# Altium PCB An toan tia lua 1.PcbDoc
Units mil, origin at the board's own origin, x right, y up, seen from the top; angles counter-clockwise.
Board outline 1015.03 x 2315.03 mil, 2 copper layers (Top Layer, Bottom Layer); 3 components, 12 nets, 35 pads, 0 vias.
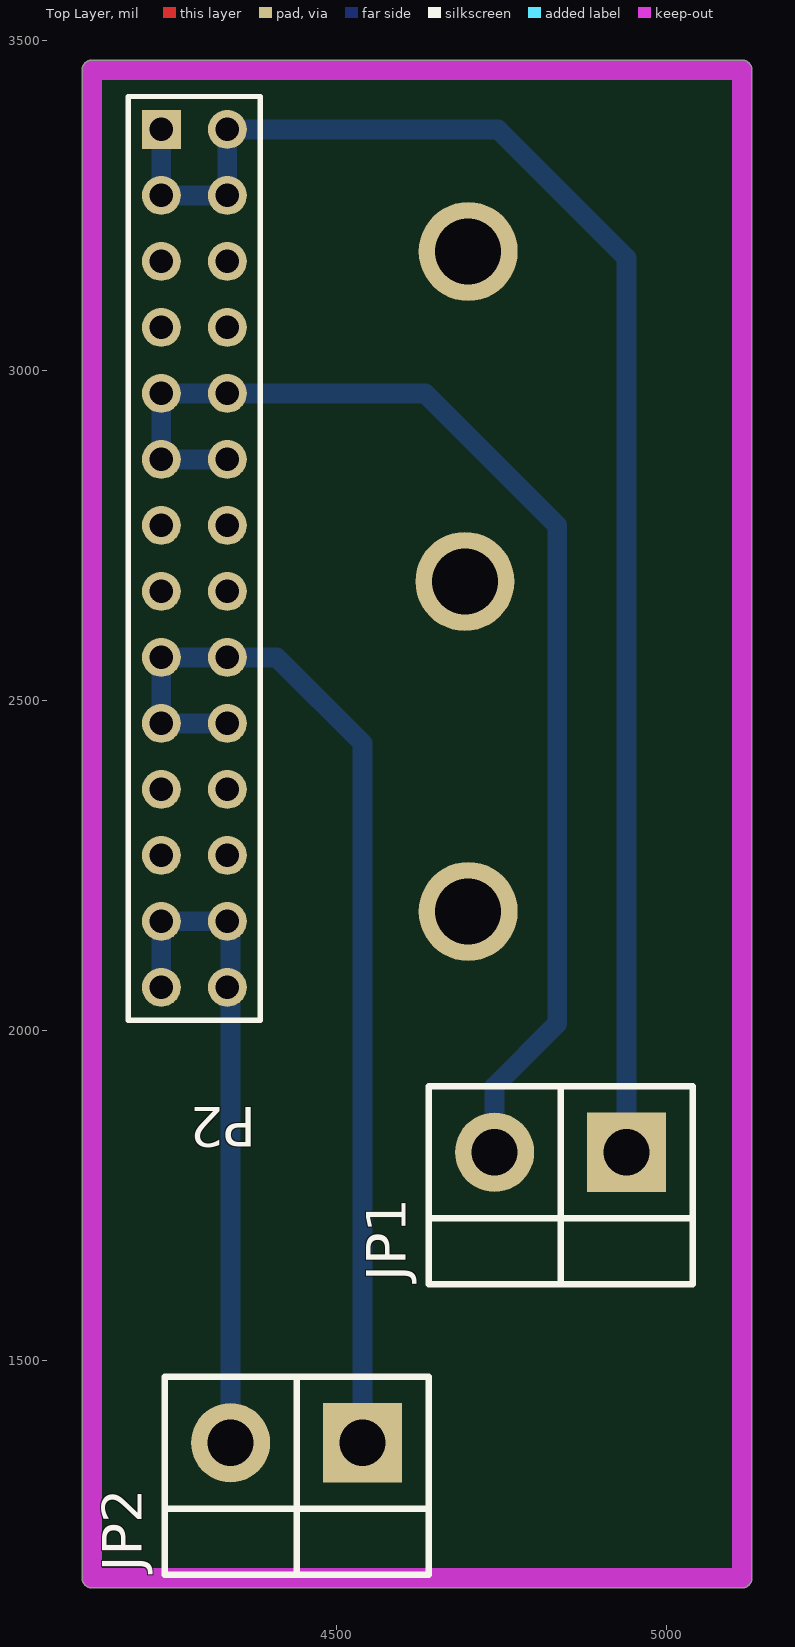
[diagram p0: Top Layer view]
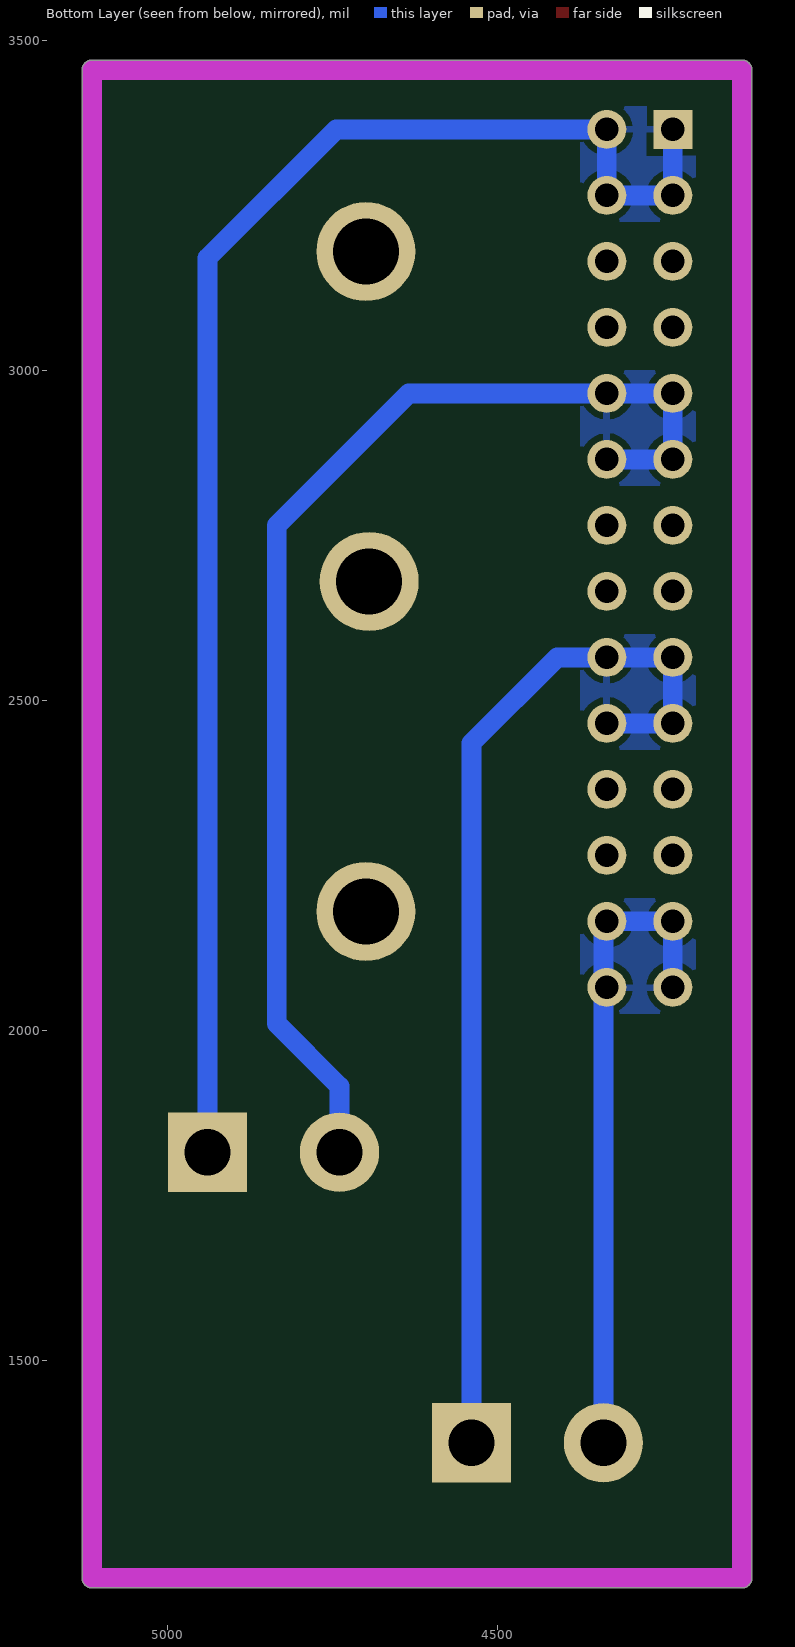
[diagram p1: Bottom Layer view, seen from below]

## Layer stack, top to bottom
Top Solder: solder mask 0.4, Solder Resist, Dk 3.5
Top Layer: signal copper 1.4
Dielectric 1: dielectric 12.6, FR-4, Dk 4.8
Bottom Layer: signal copper 1.4
Bottom Solder: solder mask 0.4, Solder Resist, Dk 3.5

## Board outline
4114.98,1170 ccw(c4130,1170) 4130,1154.98 5115,1154.98 ccw(c5115,1170) 5130.02,1170 ccw(c5115,1170) 5129.81,1172.5 ccw(c5115,1175) 5130.02,1175 5130.02,3455 ccw(c5115,3455) 5115,3470.01 4130,3470.01 ccw(c4130,3455) 4114.98,3455

## Design rules (kind name [scope] priority, off if disabled: settings)
Clearance [All] p1: gap=10
PolygonConnect [All] p1: connectstyle=Relief reliefconductorwidth=10 reliefentries=4 polygonreliefangle="90 Angle" airgapwidth=10
RoutingVias [All] p1: holewidth=28 width=50 viastyle="Through Hole" minholewidth=28 minwidth=50 maxholewidth=28 maxwidth=50
SolderMaskExpansion [All] p1: expansion=4
Width [All] p1: maxlimit=100 minlimit=10 preferedwidth=30
30 further rules are at their usual default settings.

## Components (designator, comment, footprint, x,y, rotation, side; value= is the part's Value field where it differs from the comment)
JP1 "JP2" CON2 4940,1815 r180 top
JP2 "JP2" CON2 4540,1375 r180 top
P2 "Header 14X2" HDR2X14 4235,3365 r270 top

## Footprints (in the part's own frame and the unit in brackets; to place one, negate y for a bottom-side part, rotate by r counter-clockwise, add the part's x,y. Pads: shape width x height; smd on the part's side, far side on the other; paste and mask are expansions set on the pad)
CON2 [mil]
  rect 120x120 hole 70: 1(0,0)
  round 120 hole 70: 2(200,0)
  silkscreen extent -100,-100 300,200
HDR2X14 [mm] "Connector; Header; 14x2 Position"
  rect 1.5x1.5 hole 0.9: 1(0,0)
  round 1.5 hole 0.9: 2(0,2.54) 3(2.54,0) 4(2.54,2.54) 5(5.08,0) 6(5.08,2.54) 7(7.62,0) 8(7.62,2.54) 9(10.16,0) 10(10.16,2.54) 11(12.7,0) 12(12.7,2.54) 13(15.24,0) 14(15.24,2.54) 15(17.78,0) 16(17.78,2.54) 17(20.32,0) 18(20.32,2.54) 19(22.86,0) 20(22.86,2.54) 21(25.4,0) 22(25.4,2.54) 23(27.94,0) 24(27.94,2.54) 25(30.48,0) 26(30.48,2.54) 27(33.02,0) 28(33.02,2.54)
  silkscreen extent -1.27,-1.27 34.29,3.81

## Part data
JP1 JP2: library part Con2, "Connector 2"
P2: "Header, 14-Pin, Dual row"

## Free pads (board coordinates)
  round 150 hole 100: 0(4700,3180) 1(4695,2680) 2(4700,2180)

## Nets (pads, with @x,y where several pads share a name; then routed paths per layer and width w, separated by ;. In a path a pad name is that pad's centre, name@x,y a point inside that pad or via, vN(x,y) a via of type N, cw(c..) or ccw(c..) an arc to the next point about the centre after c; other vN are vias at no path point)
LINE1+: 
LINE1-: 
LINE+: 
NetD1_1: 
NetD1_2: 
NetD2_2: 
NetD3_2: 
NetF1_2: 
NetJP1_1: JP1.1 P2.1 P2.2 P2.3 P2.4 | length 2340.8
  Bottom Layer w30: P2.1 P2.3 P2.4 P2.2 4745,3365 4940,3170 JP1.1
NetJP1_2: JP1.2 P2.9 P2.10 P2.11 P2.12 | length 1872.2
  Bottom Layer w30: P2.12 P2.11 P2.9 P2.10 4635,2965 4835,2765 4835,2010 4740,1915 JP1.2
NetJP2_1: JP2.1 P2.17 P2.18 P2.19 P2.20 | length 1618.8
  Bottom Layer w30: P2.20 P2.19 P2.17 P2.18 4410,2565 4540,2435 JP2.1
NetJP2_2: JP2.2 P2.25 P2.26 P2.27 P2.28 | length 992.1
  Bottom Layer w30: P2.27 P2.25 P2.26 4340,2160 JP2.2
pads on no net: P2.5 P2.6 P2.7 P2.8 P2.13 P2.14 P2.15 P2.16 P2.21 P2.22 P2.23 P2.24

## Polygon pours and split planes (outlines as drawn)
NetJP1_1 on Bottom Layer "NETJP1_1_L02_P006" (solid, pour order 6): 4200,3400 4375,3400 4375,3225 4200,3225 4200,3400
NetJP1_2 on Bottom Layer "NETJP1_2_L02_P004" (solid, pour order 4): 4200,3000 4375,3000 4375,2825 4200,2825 4200,3000
NetJP2_1 on Bottom Layer "NETJP2_1_L02_P002" (solid, pour order 2): 4200,2600 4375,2600 4375,2425 4200,2425 4200,2600
NetJP2_2 on Bottom Layer "NETJP2_2_L02_P000" (solid, pour order 0): 4200,2200 4375,2200 4375,2025 4200,2025 4200,2200

## Keep-outs
Keep-Out Layer:
  lines w30: 5115,1170 4130,1170 4130,3455 5115,3455 5115,1175